# Altium PCB Flybuck.PcbDoc
Units mil, origin at the board's own origin, x right, y up, seen from the top; angles counter-clockwise.
Board outline 2500 x 2400 mil, 2 copper layers (Top Layer, Bottom Layer); 21 components, 14 nets, 61 pads, 7 vias.
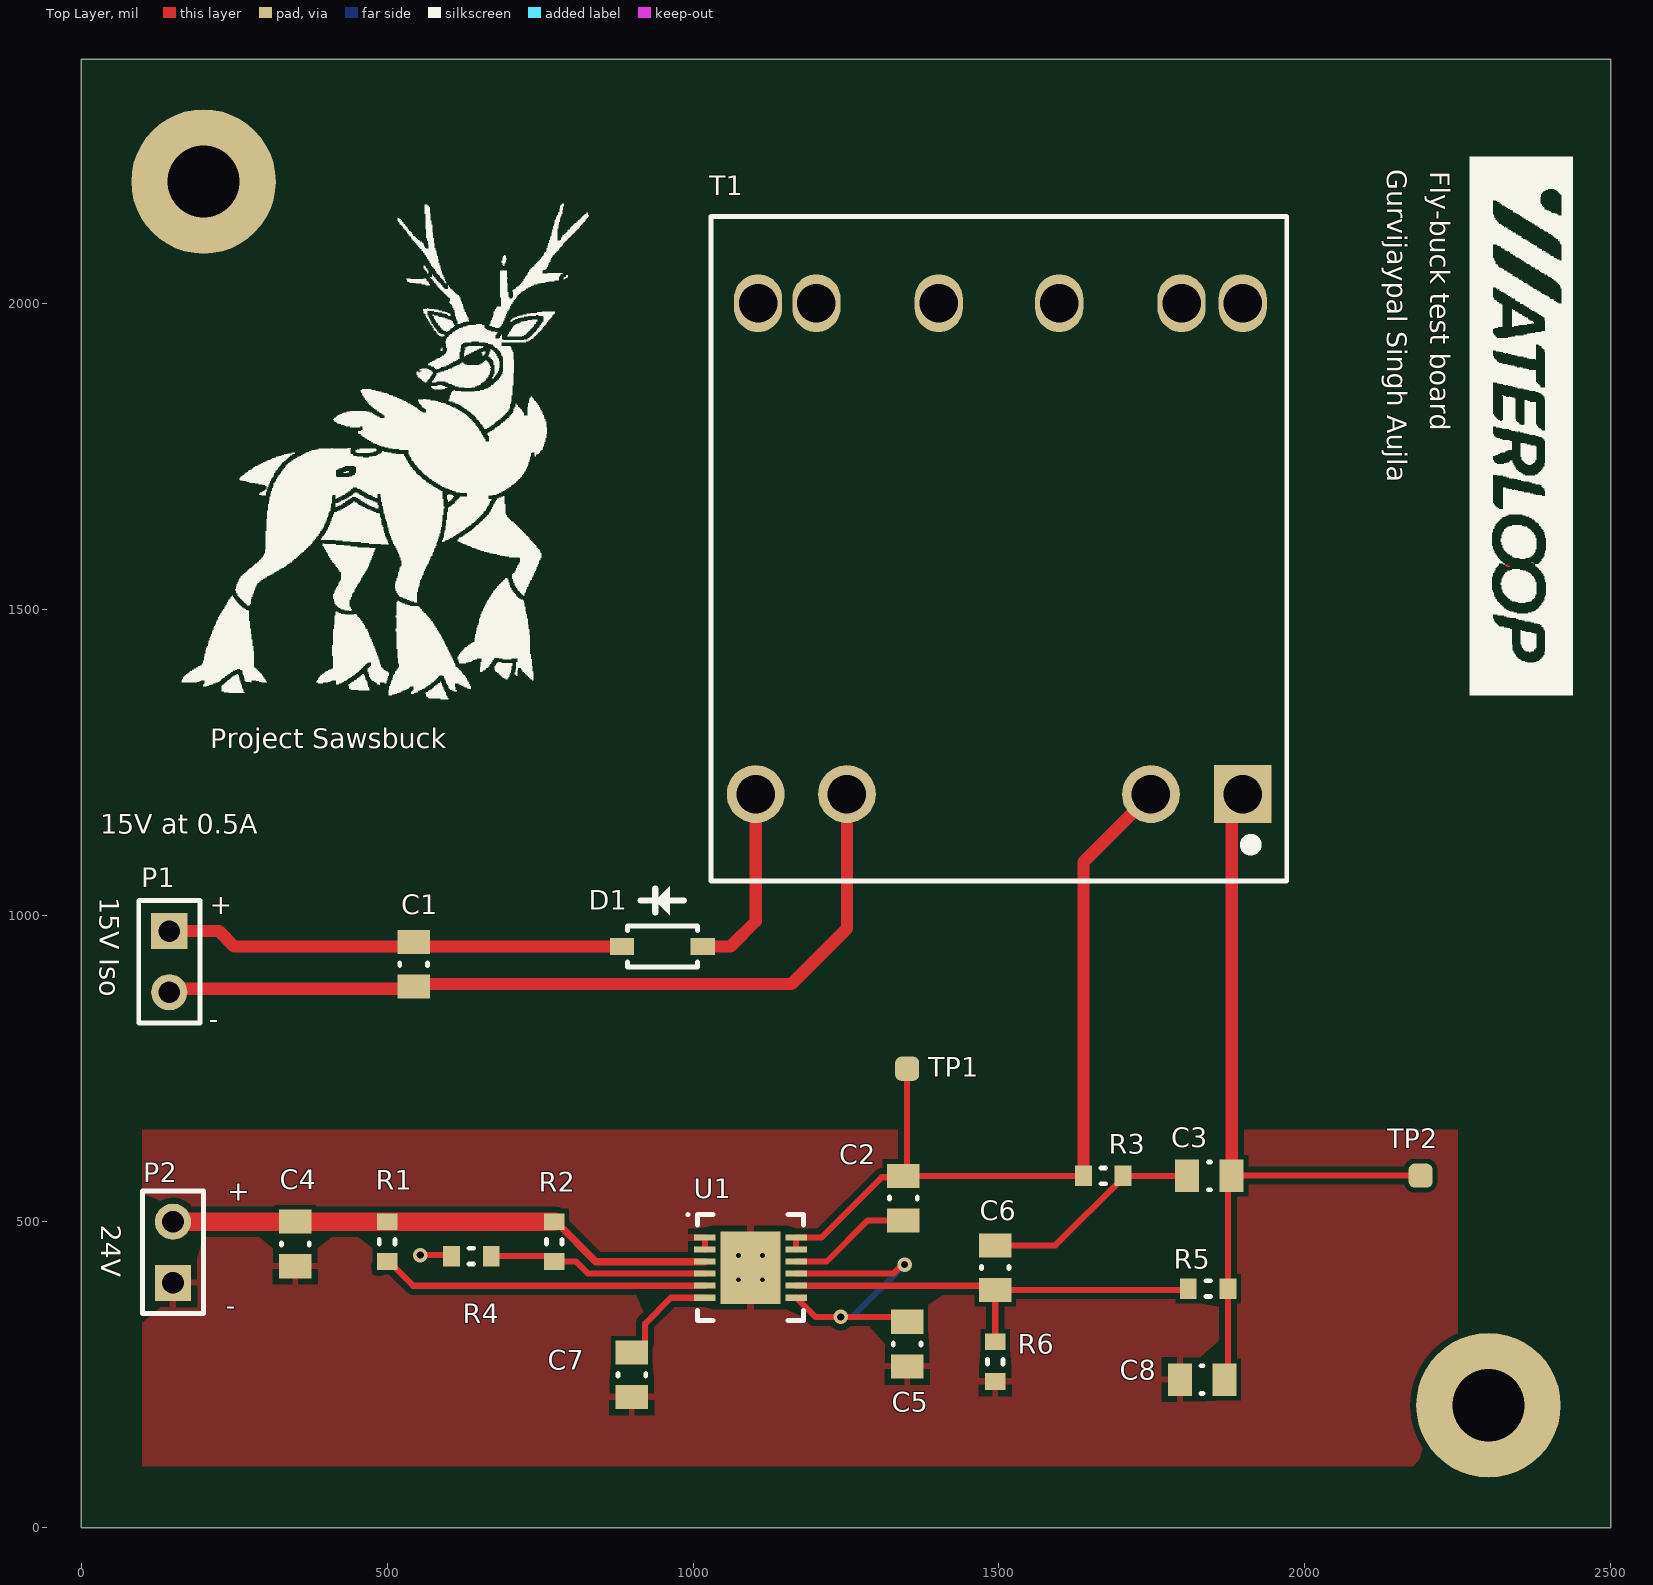
[diagram p0: Top Layer view]
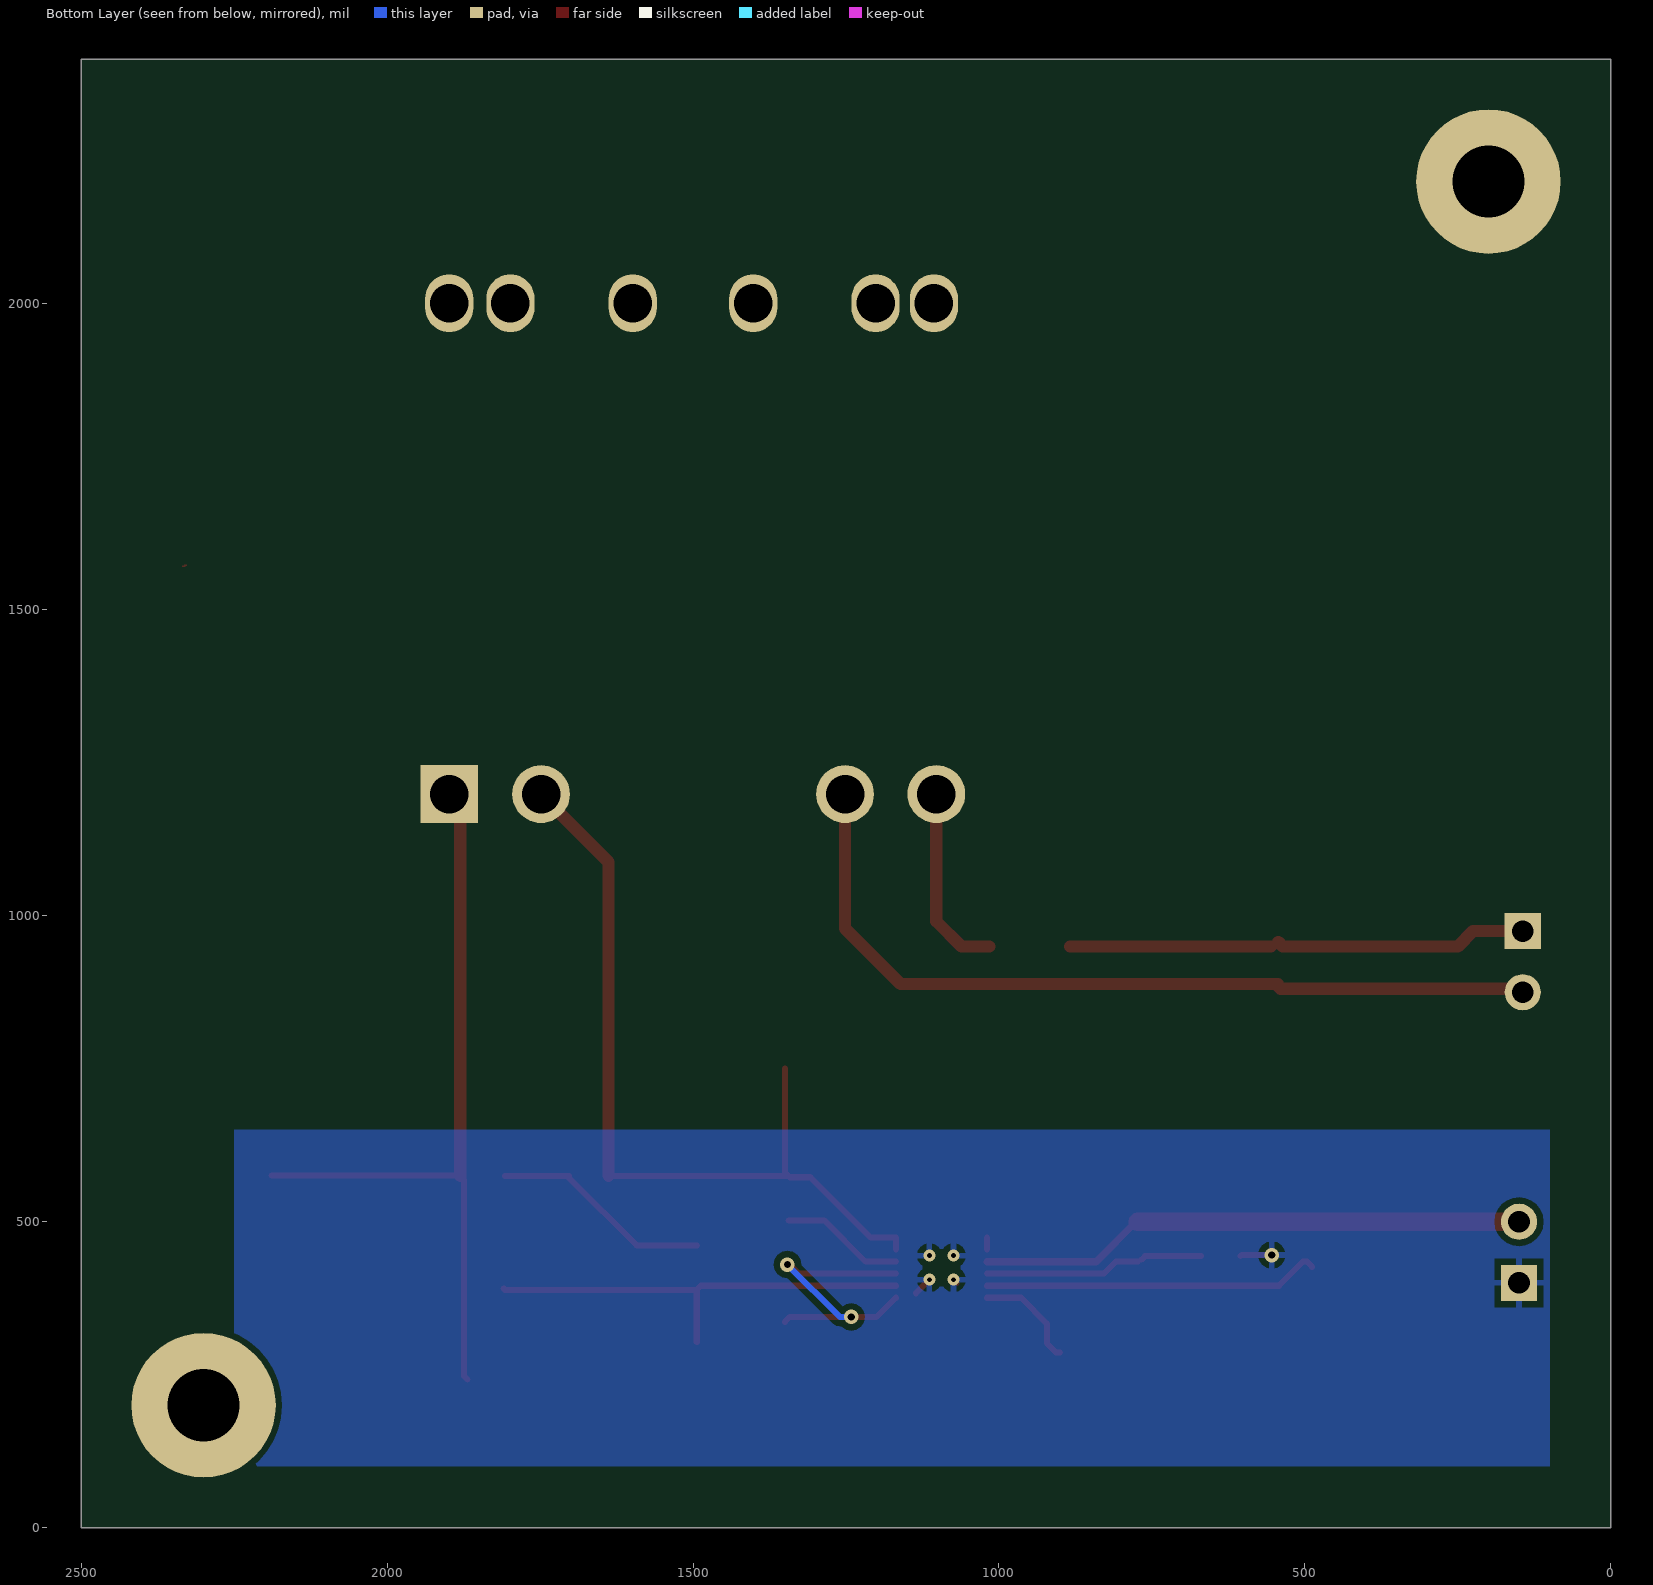
[diagram p1: Bottom Layer view, seen from below]
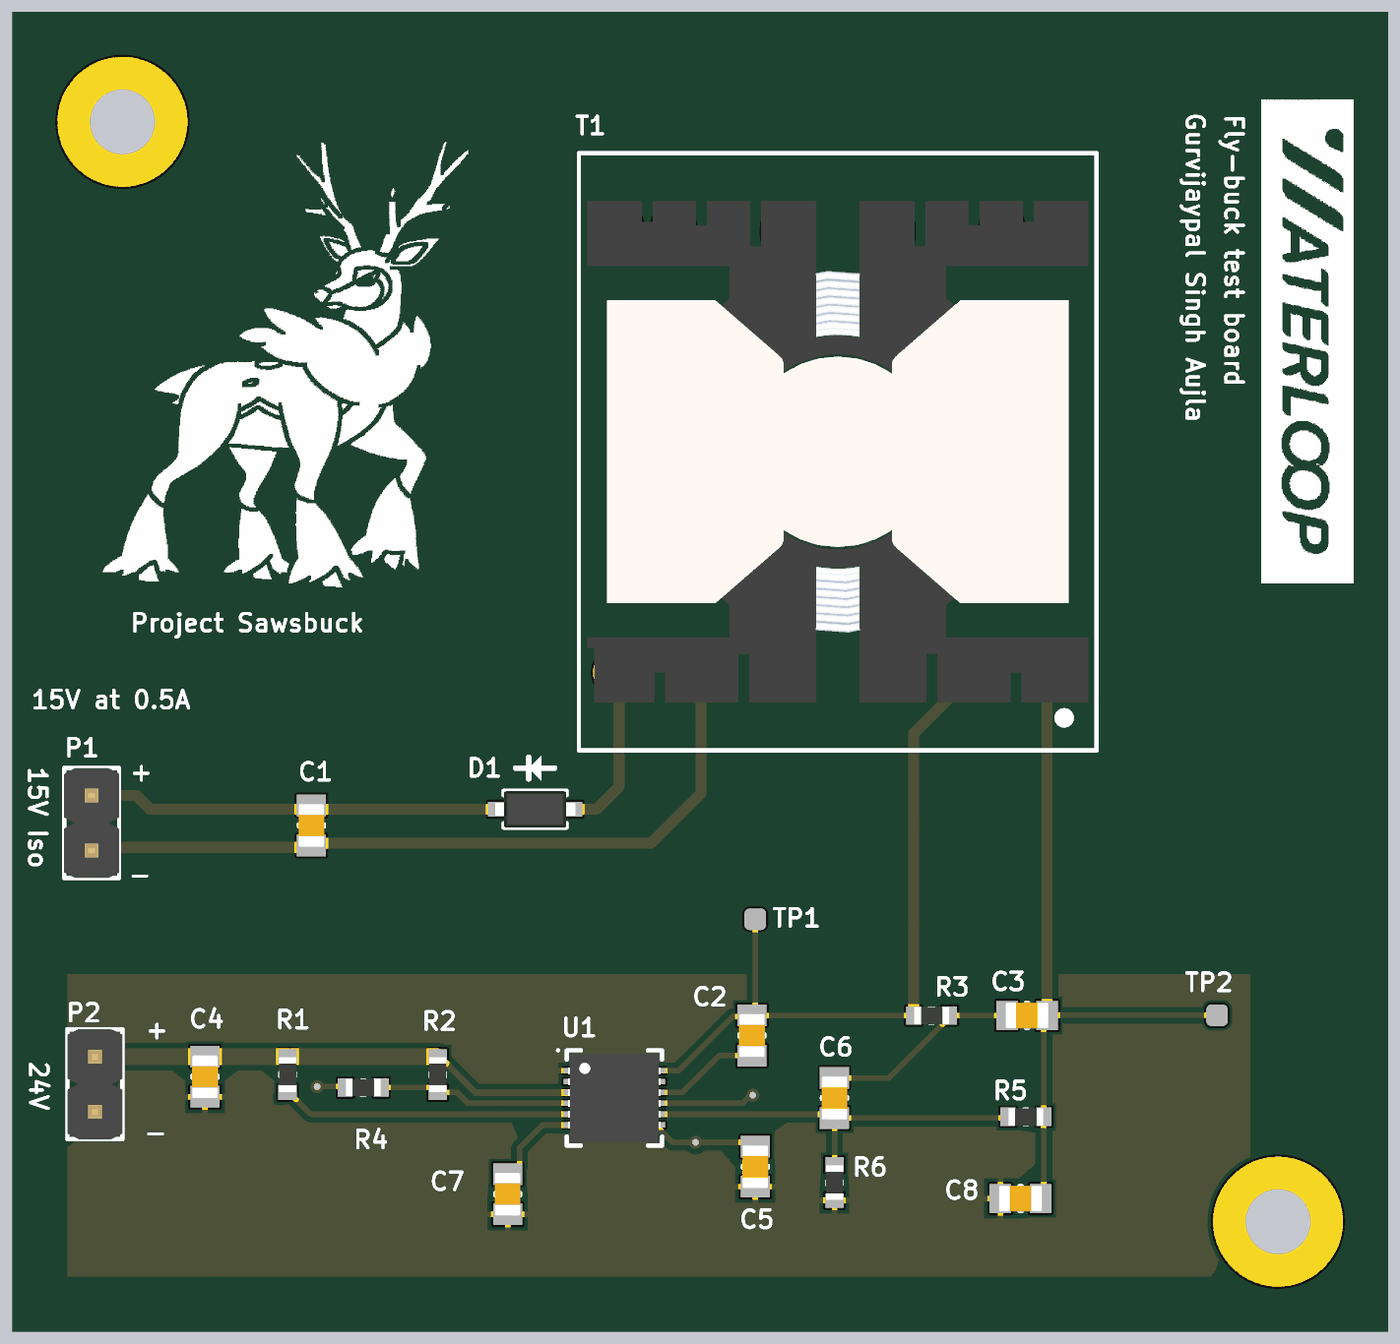
[diagram p2: 3D render of the assembled board from above, using the file's embedded part models]

## Layer stack, top to bottom
Top Solder: solder mask 0.4, Solder Resist, Dk 3.5
Top Layer: signal copper 1.4
Dielectric 1: dielectric 12.6, FR-4, Dk 4.8
Bottom Layer: signal copper 1.4
Bottom Solder: solder mask 0.4, Solder Resist, Dk 3.5

## Board outline
0,0 2500,0 2500,2400 0,2400

## Design rules (kind name [scope] priority, off if disabled: settings)
Clearance [All] p1: gap=10 ignorepadtopadclearanceinfootprint=FALSE except(0: Arc-Hole Track-Hole SMDPad-Hole THPad-Hole Via-Hole Fill-Hole Poly-Hole Region-Hole Text-Hole; 5: Arc-Arc Arc-Track Track-Track SMDPad-SMDPad; 7.87: Arc-SMDPad Track-SMDPad SMDPad-Fill SMDPad-Poly SMDPad-Region)
MinimumSolderMaskSliver [All] p1: minsoldermaskwidth=7.87
PolygonConnect [All] p1: connectstyle=Relief reliefconductorwidth=10 reliefentries=4 polygonreliefangle="90 Angle" airgapwidth=10
RoutingVias [All] p1: holewidth=19.68 width=39.37 viastyle="Through Hole" minholewidth=7.87 minwidth=23.62 maxholewidth=28 maxwidth=50
SilkToSolderMaskClearance [IsPad] p1: minsilkscreentomaskgap=5.91 clearancetoexposedcopper=TRUE
SolderMaskExpansion [All] p1: expansion=4 istentingtop=FALSE
Width [All] p1: maxlimit=50 minlimit=10 preferedwidth=15 toplayer_prefwidth=10 minimp=50.000000 maximp=50.000000 favimp=50.000000
28 further rules are at their usual default settings.

## Components (designator, comment, footprint, x,y, rotation, side; value= is the part's Value field where it differs from the comment)
C1 "Cout2" "0805 - Capacitor" 543.37,920.63 r90 top value=10uF
C2 "Cbst" "0805 - Capacitor" 1343.96,538.52 r270 top value=10nF
C3 "Cr" "0805 - Capacitor" 1843.96,574.94 r180 top value=2.2nF
C4 "Cin" "0805 - Capacitor" 350,463.58 r90 top value=1uF
C5 "Cvcc" "0805 - Capacitor" 1350,300 r90 top value=1uF
C6 "Cac" "0805 - Capacitor" 1493.96,424.94 r90 top value=100nF
C7 "Css" "0805 - Capacitor" 900,250 r90 top value=27nF
C8 "Cout1" "0805 - Capacitor" 1832.04,242.02 r0 top value=4.7uF
D1 "Diode - Schottky" "SOD123 - DIODE" 950,950 r180 top value=0.5A
P1 "15VOUT" HDR1X2 143.96,974.94 r270 top
P2 "19.2-25.2VIN" HDR1X2 150,400 r90 top
R1 "Ron" "0603 - Resistor" 500,467.52 r270 top value=113K
R2 "Ruvt" "0603 - Resistor" 773.05,467.52 r90 top value=133K
R3 "Rr" "0603 - Resistor" 1670.47,574.94 r0 top value=40.2K
R4 "Ruvb" "0603 - Resistor" 637.74,443.9 r0 top value=10K
R5 "Rfbt" "0603 - Resistor" 1841.88,390.68 r0 top value=5.9K
R6 "Rfbb" "0603 - Resistor" 1493.96,271.22 r90 top value=2.5K
T1 "WE-750315038" WE-750315038 1500,1600 r270 top
TP1 "Test Point" "Test Point" 1350,750 r90 top
TP2 "Test Point" "Test Point" 2189.11,575.36 r90 top
U1 "LM5160DNTR" LM5160DNTR 1093.96,424.94 r0 top

## Footprints (in the part's own frame and the unit in brackets; to place one, negate y for a bottom-side part, rotate by r counter-clockwise, add the part's x,y. Pads: shape width x height; smd on the part's side, far side on the other; paste and mask are expansions set on the pad)
"0603 - Resistor" [mm] "0603 Chip Resistor - IPC Medium Density"
  rect 0.7x0.85 smd: 1(-0.825,0) 2(0.825,0)
  silkscreen extent -0.1,-0.33 0.1,0.33, body extent -0.8,-0.4 0.8,0.4, height 0.45
"0805 - Capacitor" [mm] "0805 Chip Capacitor - IPC Medium Density"
  rect 1x1.35 smd: 1(-0.925,0) 2(0.925,0)
  silkscreen extent -0.05,-0.58 0.05,0.58, body extent -1,-0.6 1,0.6, height 1.2
HDR1X2 [mm] "Connector; Header; 2 Position"
  rect 1.5x1.5 hole 0.9: 1(0,0)
  round 1.5 hole 0.9: 2(2.54,0)
  silkscreen extent -1.27,-1.27 3.81,1.27, body extent -1.27,-1.27 3.81,1.27, height 8.54
LM5160DNTR [mm] "SON, 12-Leads, Body 4.00x4.00mm, Pitch 0.50mm, Thermal Pad 3.00x2.49mm, IPC Medium Density"
  rect 0.9x0.25 smd: 1(-1.895,1.25) 2(-1.895,0.75) 3(-1.895,0.25) 4(-1.895,-0.25) 5(-1.895,-0.75) 6(-1.895,-1.25) 7(1.895,-1.25) 8(1.895,-0.75) 9(1.895,-0.25) 10(1.895,0.25) 11(1.895,0.75) 12(1.895,1.25)
  rect 2.49x3 smd paste-1.245: 13(0,0)
  silkscreen extent -2.65,-2.2 2.2,2.25, body extent -2.13,-2.05 2.13,2.05, height 1
"SOD123 - DIODE" [mm] "SOD, 2-Leads, Body 1.55x3.70mm, IPC Medium Density"
  rect 1x0.7 smd: 1(-1.675,0) 2(1.675,0)
  silkscreen extent -1.45,-2.5 1.45,0.85, body extent -1.85,-0.85 1.85,0.85, height 1.35
"Test Point" [mm] "Test Point"
  rrect50% 1x1 smd: 0(0,0)
WE-750315038 [mm]
  rect 2.4x2.4 hole 1.6: 1(10.19,10.12)
  round 2.4 hole 1.6: 2(10.19,6.31) 5(10.19,-6.31) 6(10.19,-10.1)
  oval 2.4x2 hole 1.6: 7(-10.19,-10) 8(-10.19,-7.58) 10(-10.19,-2.5) 11(-10.19,2.5) 13(-10.19,7.58) 14(-10.19,10.12)
  silkscreen extent -13.79,-11.95 13.79,11.95, body extent -11.58,-11.58 11.58,11.57, height 22.1

## Part data
C1 C2 C3 C4 C5 C6 C7 C8: library part "Capacitor - Nonpolarized", "Nonpolarized Capacitor"
D1: "Schottky Rectifier", Rating=150V, ComponentLink1Description="Manufacturer Link", ComponentLink1URL=http://www.irf.com/, ComponentLink2Description=Datasheet, ComponentLink2URL=http://www.irf.com/product-info/datasheets/data/10tq.pdf
P1 P2: library part "1x2 Header", "1x2 Pin Header"
R1 R2 R3 R4 R5 R6: library part Resistor, "Resistor"
T1: "TRANSFORMER 36.5uH 300mA THT 26VDC", Manufacturer="Würth Elektronik", Manufacturer Part Number=750315038, Supplier Part Number=1297-1155-ND, Datasheet=https://www.we-online.com/catalog/datasheet/750315038.pdf, Supplier=Digikey
TP1 TP2: "Test Point!"
U1: "IC REG BUCK FLYBCK ADJ 12WSON", Manufacturer="Texas Instruments", Supplier Part Number=296-46122-1-ND, Datasheet=https://www.ti.com/lit/ds/symlink/lm5160.pdf?HQS=TI-null-null-digikeymode-df-pf-null-wwe&ts=1605241040592, Manufacturer Part Number=LM5160DNTR, Supplier=Digikey

## Free pads (board coordinates)
  round 236.22 hole 118.11: 2(200,2200) 2(2300,200)

## Via types
v1: diameter 19.68, hole 7.87, Top Layer to Bottom Layer, 4 vias
v2: diameter 23.62, hole 11.81, Top Layer to Bottom Layer, tented top, 3 vias

## Nets (pads, with @x,y where several pads share a name; then routed paths per layer and width w, separated by ;. In a path a pad name is that pad's centre, name@x,y a point inside that pad or via, vN(x,y) a via of type N, cw(c..) or ccw(c..) an arc to the next point about the centre after c; other vN are vias at no path point)
15V_ISO: C1.2 D1.2 P1.1 | length 757.5
  Top Layer w10: C1.2 C1.2@554.72,945.69
  Top Layer w20: P1.1 225.06,974.94 250,950 536.32,950 C1.2 ; C1.2@555.31,950 D1.2
24V_IN: C4.2 P2.2 R1.1 R2.2 U1.3 | length 896.4
  Top Layer w12: R2.2 776,500 841.22,434.78 U1.3
  Top Layer w30: P2.2 C4.2 R1.1 R2.2
GND: C4.1 C5.1 C7.1 C8.1 P2.1 R4.1 R6.1 U1.1 U1.2 U1.13 | length 110.2
  Top Layer w10: v2(554.03,445.52) 603.64,445.52 R4.1 ; U1.2 U1.1 ; U1.13@1069.15,400.13 v1(1074.27,405.25) ; v1(1113.64,405.25) U1.13@1135.85,383.05
  other v1: 1074.27,444.62 1113.64,444.62
ISO_GND: C1.1 P1.2 T1.5 | length 1367.9
  Top Layer w20: P1.2 149.78,880.76 539.92,880.76 C1.1 ; C1.1@543.96,888.52 1160.69,888.52 1251.57,979.4 T1.5
NetC2_1: C2.1 R3.1 T1.2 TP1.0 U1.11 U1.12 | length 1378
  Top Layer w10: U1.11 U1.12 1209.74,474.15 1308.24,572.65 1341.67,572.65 C2.1 ; TP1.0 1350,580.98 C2.1 ; R3.1 C2.1 ; T1.2@1748.43,1198.43 T1.2
  Top Layer w20: R3.1 1637.99,1087.99 T1.2@1748.43,1198.43
NetC2_2: C2.2 U1.10 | length 203.3
  Top Layer w10: U1.10 1218.13,434.78 1285.46,502.1 C2.2
NetC3_1: C3.1 C8.2 R5.2 T1.1 TP2.0 | length 1280.4
  Top Layer w10: C8.2 1874.36,247.93 R5.2 1874.36,568.92 C3.1 1880.8,575.36 TP2.0 ; T1.1@1880.38,1180.77 T1.1
  Top Layer w20: C3.1 T1.1@1880.38,1180.77 ; T1.1 T1.1@1900,1197.24
NetC3_2: C3.2 C6.2 R3.2 | length 362.4
  Top Layer w10: C6.2 1592.32,461.36 1702.95,571.99 R3.2 C3.2
NetC5_2: C5.2 U1.7 U1.9 | length 520.7
  Top Layer w10: U1.7 1199.98,344.31 v2(1241.48,344.31) 1342.1,344.31 C5.2 ; U1.9 1327.13,415.1 1342.01,429.97 v2(1345.69,429.97)
  Bottom Layer w10: v2(1241.48,344.31) 1260.04,344.31 v2(1345.69,429.97)
NetC6_1: C6.1 R5.1 R6.2 U1.8 | length 729.4
  Top Layer w10: U1.8 1487.07,395.41 C6.1 ; R6.2 C6.1 ; R5.1 1807.24,388.52 C6.1
NetC7_2: C7.2 U1.6 | length 175.3
  Top Layer w10: C7.2 906.89,286.42 921.57,301.1 921.57,333.54 963.76,375.73 U1.6
NetD1_1: D1.1 T1.6 | length 311.1
  Top Layer w20: D1.1 1061.16,950 1102.36,991.21 T1.6
NetR1_2: R1.2 U1.5 | length 551.1
  Top Layer w10: R1.2@488.27,426.26 497.05,435.04 R1.2 502.95,435.04 542.58,395.41 U1.5
NetR2_1: R2.1 R4.2 U1.4 | length 353.7
  Top Layer w10: R4.2 761.23,443.9 R2.1@767,438.13 ; R2.1 808.49,435.04 828.43,415.1 U1.4
pads on no net: T1.7 T1.8 T1.10 T1.11 T1.13 T1.14

## Polygon pours and split planes (outlines as drawn)
GND on Bottom Layer "GND_L02_P001" (solid, pour order 1): 100,650 100,100 2250,100 2250,650
GND on Top Layer "GND_L01_P000" (solid, remove dead copper, pour order 0): 100,650 100,100 2250,100 2250,650

## Other copper
Top Layer:
  region: 2333.07,1570.73 2331.66,1570.73 2330.25,1570.73 2330.25,1572.14 2328.84,1572.14 2327.42,1572.14 2327.42,1573.55 2328.84,1573.55 2330.25,1573.55 2331.66,1573.55 2331.66,1572.14 2333.07,1572.14 2334.48,1572.14 2334.48,1570.73

## Silkscreen, mask and mechanical layers (free items; w line width, h text height)
Top Overlay:
  drawing of 44 lines, arcs and shapes, not listed
  text "Gurvijaypal Singh Aujla" at 2134.23,2220.08 h32 r270
  text "Fly-buck test board" at 2204.73,2216.95 h32 r270
  text "Project Sawsbuck" at 210.93,1273.75 h32
  text "15V at 0.5A" at 31.24,1134.04 h32
  text "15V Iso" at 30.69,1030.17 h32 r270
  text "+" at 210.5,1002.89 h32
  text "-" at 208.16,815.74 h32
  text "+" at 238.82,534.23 h32
  text "24V" at 32.71,495.2 h32 r270
  text "-" at 236.48,347.08 h32
Mechanical 1:
  lines w1: -0.5,0 ccw(c0,0) 0,-0.5 ; -0.5,0 ccw(c0,0) 0,-0.5 ; -0.5,0 -0.5,2400 ; -0.5,2400 cw(c0,2400) 0,2400.5 ; -0.5,2400 cw(c0,2400) 0,2400.5 ; 0,-0.5 2500,-0.5 ; 0,2400.5 2500,2400.5 ; 2500,-0.5 ccw(c2500,0) 2500.5,0 ; 2500,-0.5 ccw(c2500,0) 2500.5,0 ; 2500,2400.5 cw(c2500,2400) 2500.5,2400 ; 2500,2400.5 cw(c2500,2400) 2500.5,2400 ; 2500.5,0 2500.5,2400